# Altium PCB Control_Supply_PCB.PcbDoc (part 3 of 3)
Units mm, origin at the board's own origin, x right, y up, seen from the top; angles counter-clockwise.
Board outline 82 x 102 mm, 2 copper layers (Top Layer, Bottom Layer); 204 components, 0 nets, 808 pads, 240 vias.
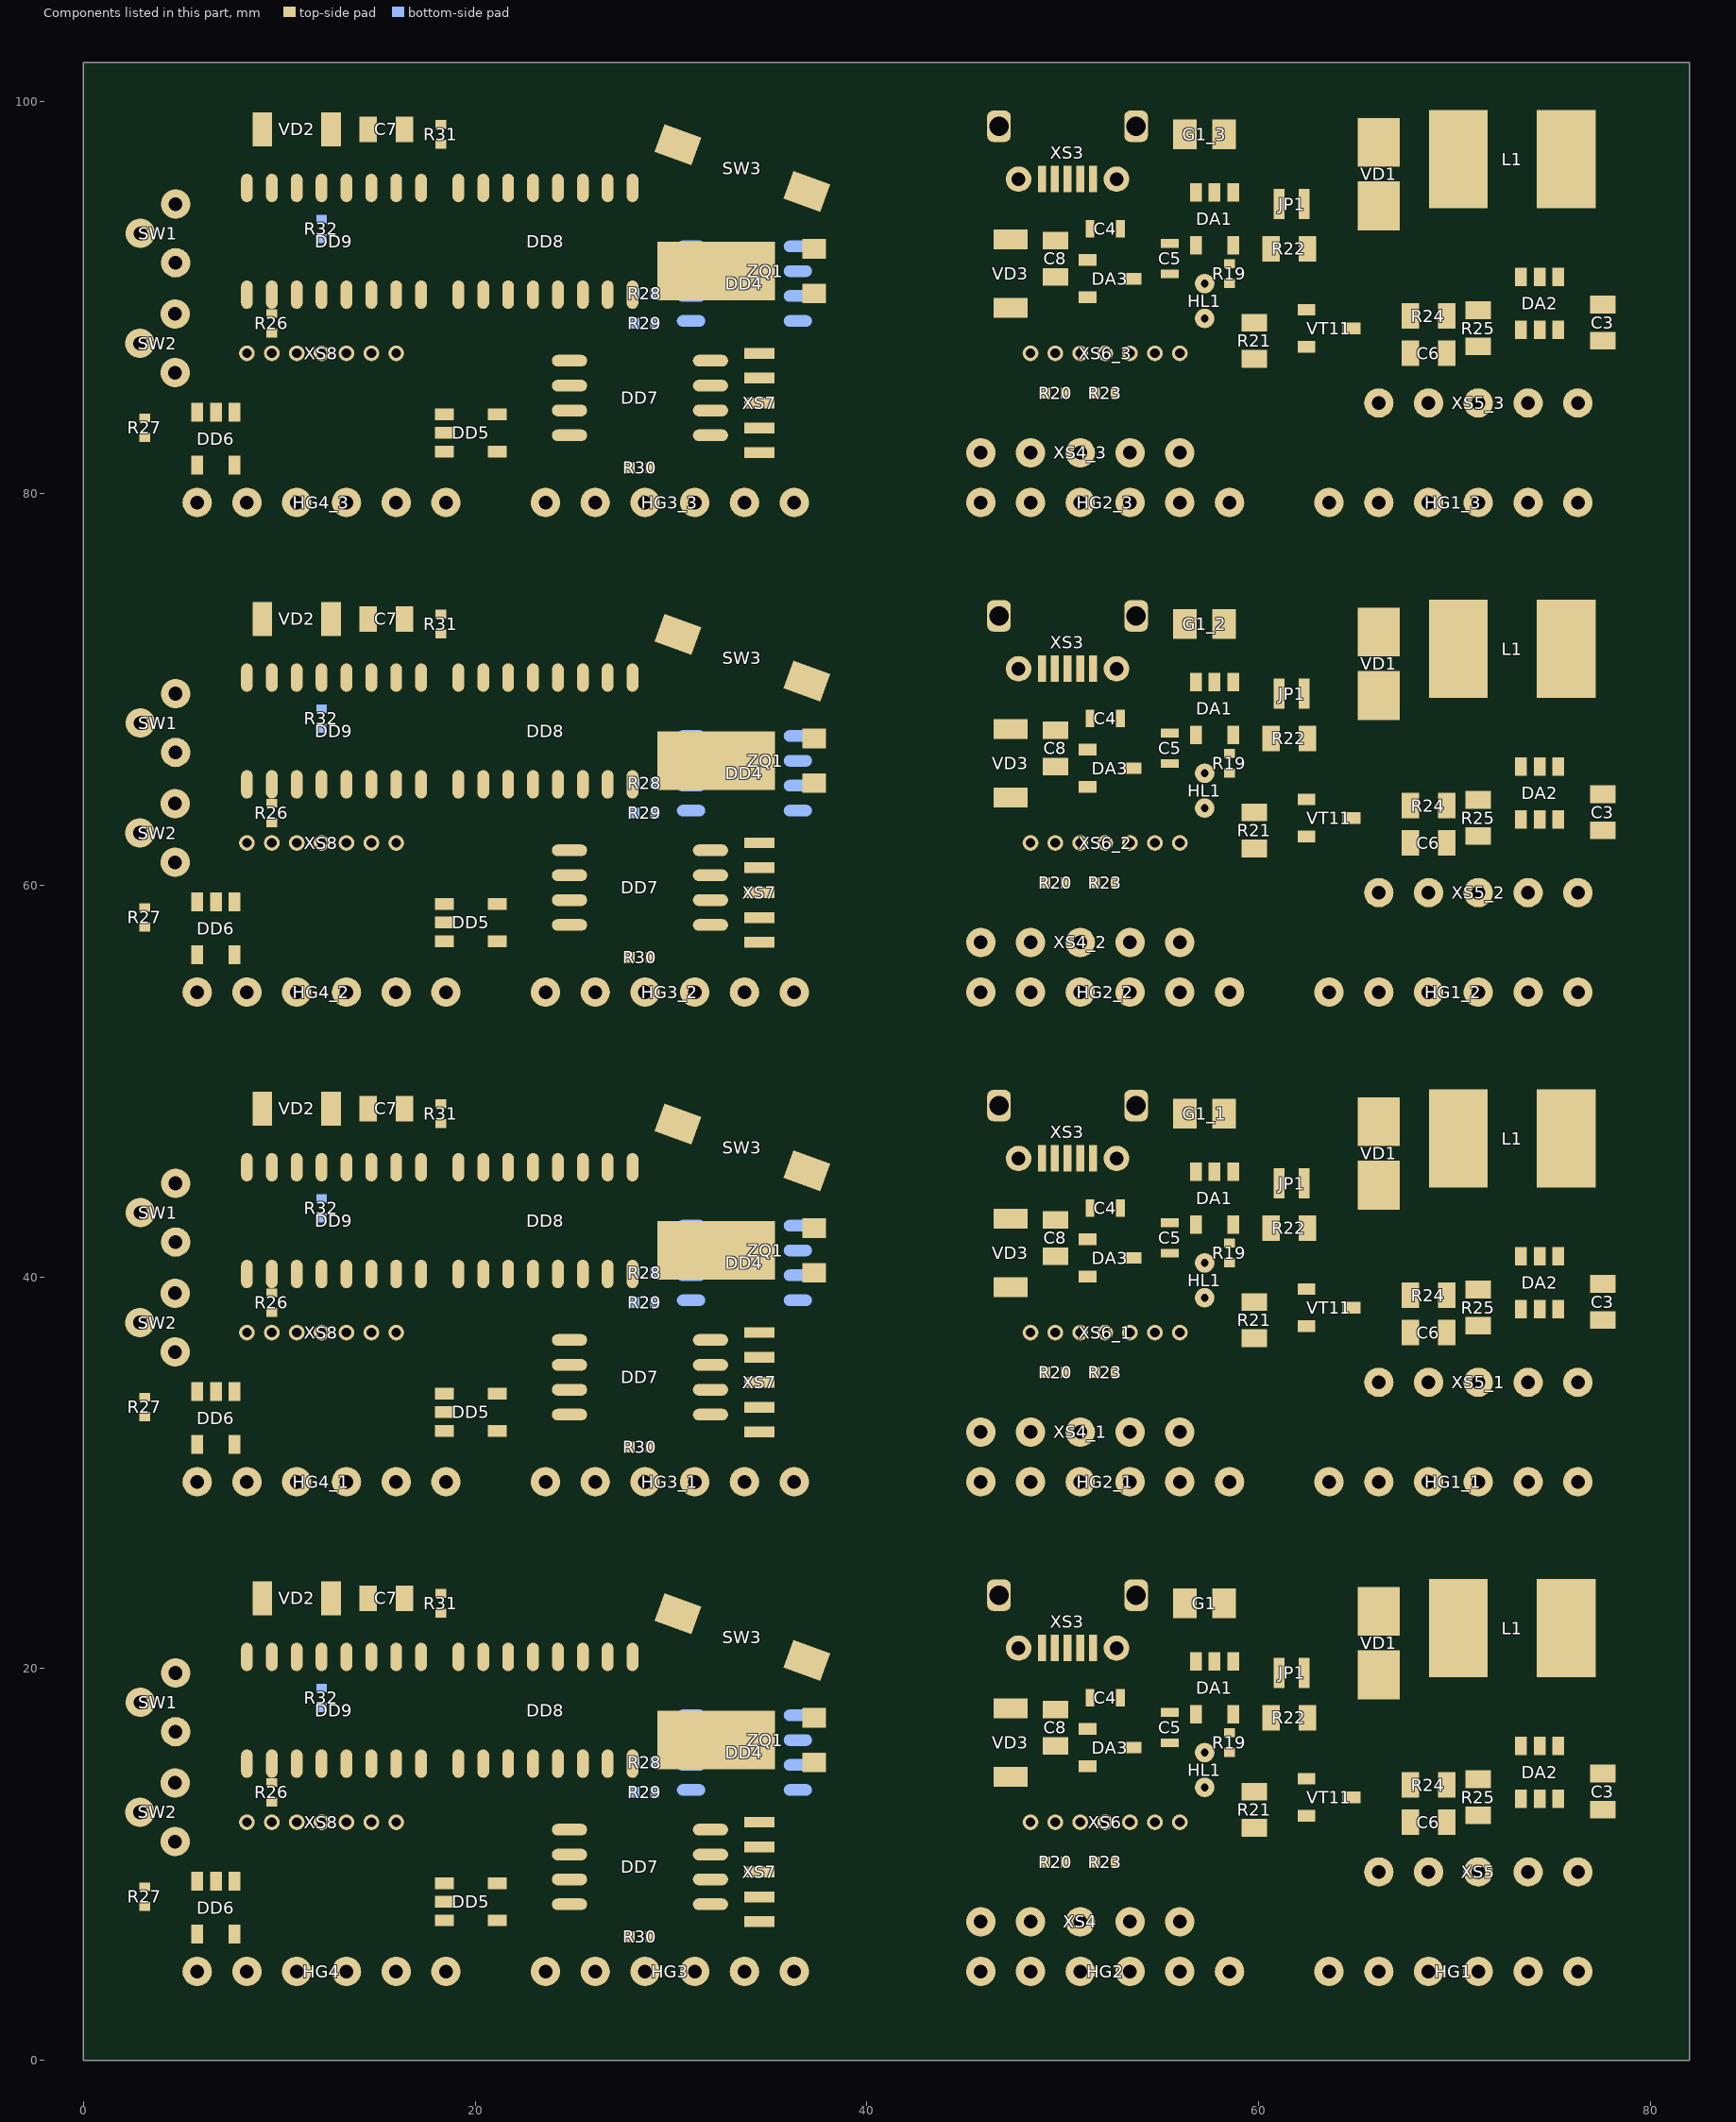
[diagram p3: the components of this part, seen from the top]

## Silkscreen, mask and mechanical layers (free items; w line width, h text height) (continued)
Board:
  lines w0.2: 2,2 2,25 40,25 40,2 2,2 ; 2,27 40,27 40,50 2,50 2,27 ; 2,52 40,52 40,75 2,75 2,52 ; 2,77 40,77 40,100 2,100 2,77 ; 42,2 80,2 80,25 42,25 42,2 ; 42,27 80,27 80,50 42,50 42,27 ; 42,52 80,52 80,75 42,75 42,52 ; 42,77 80,77 80,100 42,100 42,77
Mechanical 15:
  lines w0.2: 42,10.89 45.81,10.89 45.81,24.86 ; 42,35.89 45.81,35.89 45.81,49.86 ; 42,60.89 45.81,60.89 45.81,74.86 ; 42,85.89 45.81,85.89 45.81,99.86